# Altium PCB tablo tara.PcbDoc
Units mm, origin at the board's own origin, x right, y up, seen from the top; angles counter-clockwise.
Board outline 151 x 86.38 mm, 2 copper layers (Top Layer, Bottom Layer); 29 components, 10 nets, 72 pads, 0 vias.
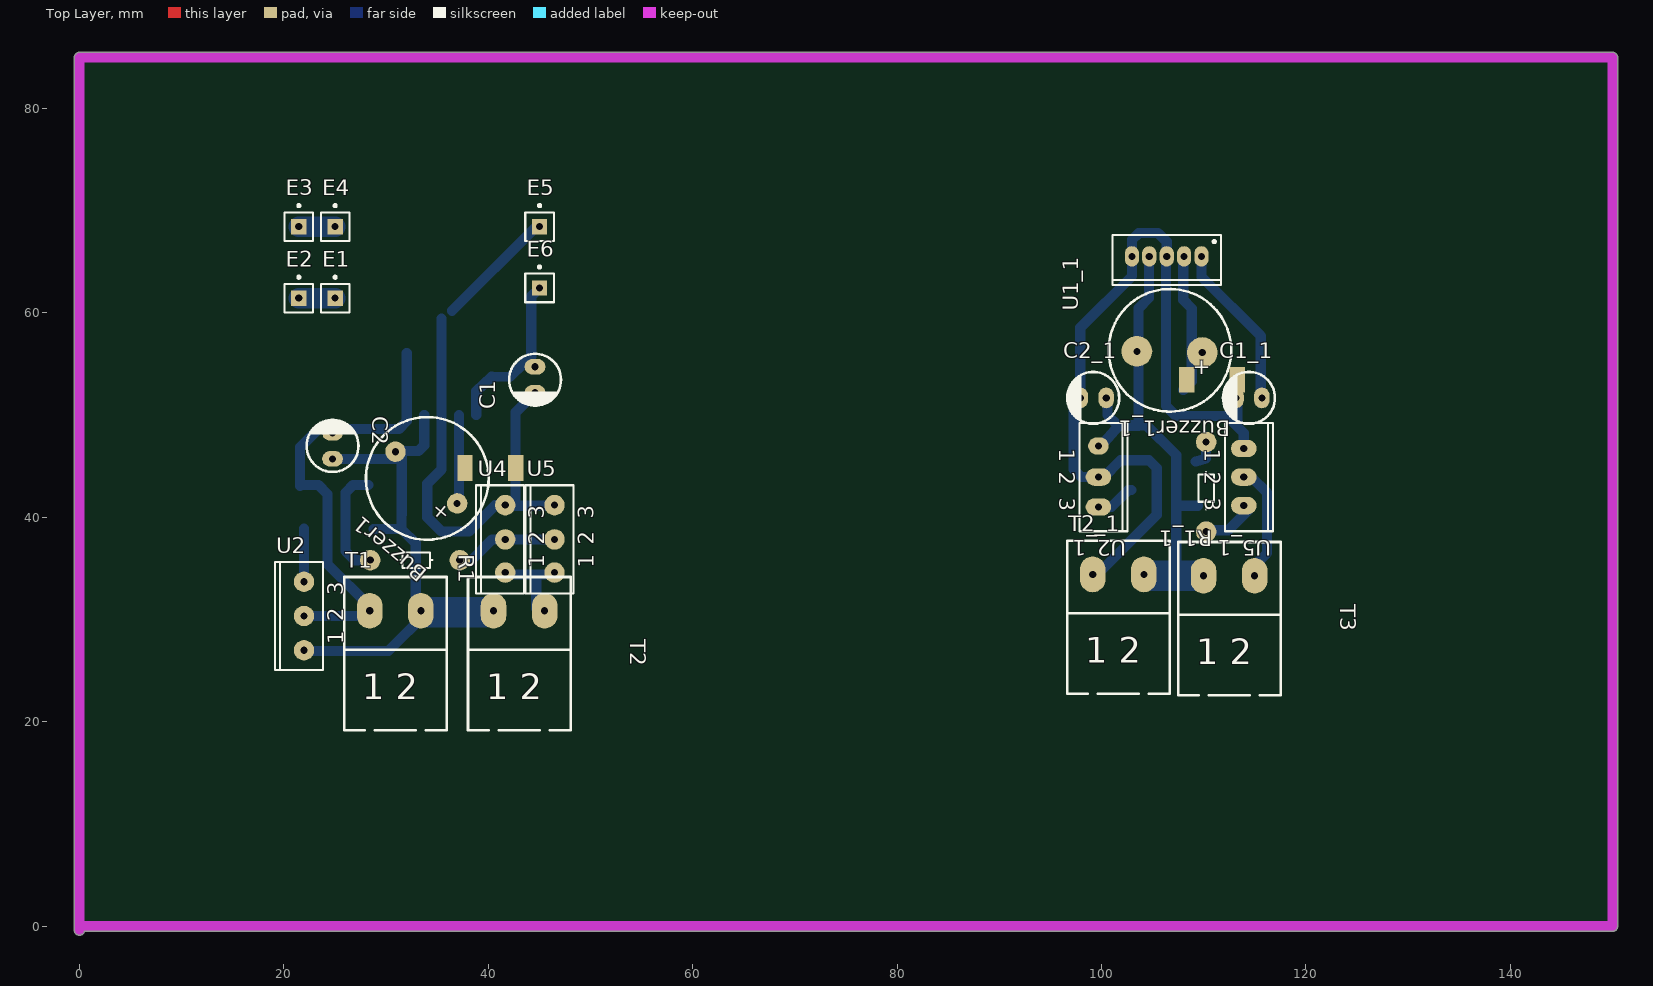
[diagram p0: Top Layer view]
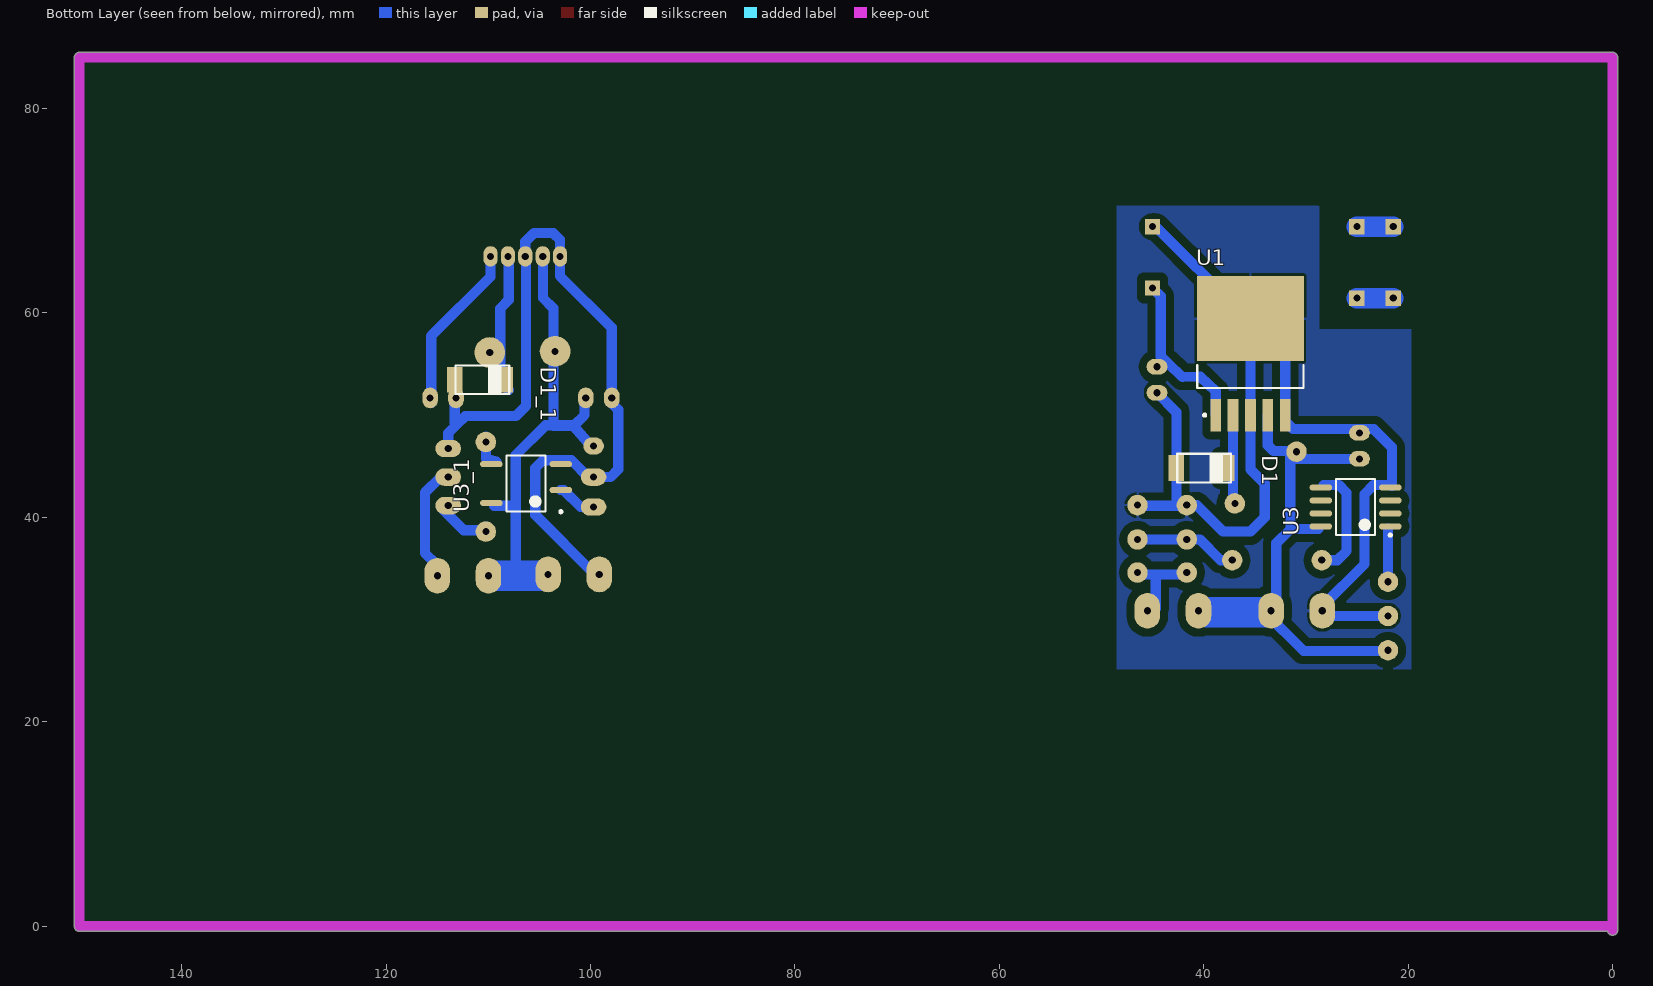
[diagram p1: Bottom Layer view, seen from below]

## Layer stack, top to bottom
Top Solder: solder mask 0.0102, Solder Resist, Dk 3.5
Top Layer: signal copper 0.0356
Dielectric 1: dielectric 0.32, FR-4, Dk 4.8
Bottom Layer: signal copper 0.0356
Bottom Solder: solder mask 0.0102, Solder Resist, Dk 3.5

## Board outline
-0.5,-0.381 -0.5,85 cw(c0,85) 0,85.5 150,85.5 cw(c150,85) 150.5,85 150.5,0 cw(c150,0) 150,-0.5 0.486,-0.5 cw(c0,-0.381)

## Design rules (kind name [scope] priority, off if disabled: settings)
Clearance Clearance_1 [InPolygon] p1: gap=0.8 ignorepadtopadclearanceinfootprint=FALSE
Clearance [All] p2: gap=0.254 ignorepadtopadclearanceinfootprint=FALSE except(0: Arc-Hole Track-Hole SMDPad-Hole THPad-Hole Via-Hole Fill-Hole Poly-Hole Region-Hole Text-Hole)
PolygonConnect [All] p1: connectstyle=Relief reliefconductorwidth=0.254 reliefentries=4 polygonreliefangle="90 Angle" airgapwidth=0.254
RoomDefinition "tablo tara" [InComponentClass('tablo tara')] p1: confinementstyle=ConfineIn formatcopy=TRUE lockcomponents=FALSE outline 144.907,-4.953 247.904,-4.953 247.904,23.114 144.907,23.114
RoutingLayers [All] p1: top layer_v5=FALSE bottom layer_v5=TRUE
RoutingVias [All] p1: holewidth=0.711 width=2.5 viastyle="Through Hole" minholewidth=0.711 minwidth=1.27 maxholewidth=0.711 maxwidth=2
SolderMaskExpansion [All] p1: expansion=0.102
Width [All] p1: maxlimit=3 minlimit=0.5 preferedwidth=1
29 further rules are at their usual default settings.

## Components (designator, comment, footprint, x,y, rotation, side; value= is the part's Value field where it differs from the comment)
Buzzer1 "Buzzer" BUZZER#1 34.036,43.815 r140 top
Buzzer1_1 "Buzzer" BUZZER#2 106.695,56.348 r180 top (schematic designator Buzzer1)
C1 "Value" ELEC-CAP-RAD10-20 44.577,53.467 r90 top
C1_1 "Value" ELEC-CAP-RAD10-20 114.427,51.689 r0 top (schematic designator C1)
C2 "Value" ELEC-CAP-RAD10-20 24.765,46.99 r270 top
C2_1 "Value" ELEC-CAP-RAD10-20 99.187,51.689 r0 top (schematic designator C2)
D1 "MODEL" DO-41 43.688,44.831 r180 bottom
D1_1 "MODEL" DO-41 114.3,53.467 r180 bottom (schematic designator D1)
E1 "Antenna" PIN1 25.019,61.448 r0 top
E2 "Antenna" PIN1 21.463,61.448 r0 top
E3 "Antenna" PIN1 21.463,68.448 r0 top
E4 "Antenna" PIN1 25.019,68.448 r0 top
E5 "Antenna" PIN1 45.018,68.448 r0 top
E6 "Antenna" PIN1 45.018,62.448 r0 top
R1 "Res2" Res50 34.163,35.814 r0 top
R1_1 "Res2" Res50 110.236,41.656 r270 top (schematic designator R1)
T1 "Phoenix terminal" "phoenix terminal 2" 25.908,19.177 r0 top
T2 "Phoenix terminal" "phoenix terminal 2" 38.02,19.177 r0 top
T2_1 "Phoenix terminal" "phoenix terminal 2" 96.647,22.733 r0 top (schematic designator T2)
T3 "Phoenix terminal" "phoenix terminal 2" 107.489,22.606 r0 top
U1 "LM2596S-3.3" TS5B_N 35.433,56.007 r90 bottom
U1_1 "LM2576T-3.3" T05A 106.377,65.532 r180 top (schematic designator U1)
U2 "L4931CV30" TO-220A#1 21.971,30.353 r90 top
U2_1 "L4931CV30" TO-220A#2 99.695,43.942 r270 top (schematic designator U2)
U3 "ATtiny15L-1SC" 8S2_N#1 25.146,41.021 r0 bottom
U3_1 "ATtiny15L-1SC" 8S2_N#2 106.299,43.307 r0 bottom (schematic designator U3)
U4 "L4931CV30" TO-220A#3 41.656,37.846 r90 top
U5 "L4931CV30" TO-220A#3 46.482,37.846 r90 top
U5_1 "L4931CV30" TO-220A#4 113.919,43.942 r270 top (schematic designator U5)

## Footprints (in the part's own frame and the unit in brackets; to place one, negate y for a bottom-side part, rotate by r counter-clockwise, add the part's x,y. Pads: shape width x height; smd on the part's side, far side on the other; paste and mask are expansions set on the pad)
8S2_N#1 [mm] "SOP, 8-Leads, Body 5.3x5.3mm, Pitch 1.27mm, IPC Medium Density"
  oval 2.2x0.6 smd: 1(-3.4,1.905) 2(-3.4,0.635) 3(-3.4,-0.635) 4(-3.4,-1.905) 5(3.4,-1.905) 6(3.4,-0.635) 7(3.4,0.635) 8(3.4,1.905)
  silkscreen extent -3.52,-2.75 1.9,2.88, body extent -2.73,-2.75 2.73,2.75, height 2.16
8S2_N#2 [mm] "SOP, 8-Leads, Body 5.3x5.3mm, Pitch 1.27mm, IPC Medium Density"
  oval 2.2x0.6 smd: 2(-3.4,0.635) 4(-3.4,-1.905) 5(3.4,-1.905) 8(3.4,1.905)
  silkscreen extent -3.52,-2.75 1.9,2.88, body extent -2.73,-2.75 2.73,2.75, height 2.16
BUZZER#1 [mm] "BUZZER"
  round 2 hole 0.7: 1(-3.81,0) 2(4.064,0)
  silkscreen extent -6,-6 6,6
BUZZER#2 [mm] "BUZZER"
  round 3 hole 0.7: 1(-3.16,0.214) 2(3.231,0.105)
  silkscreen extent -6,-6 6,6
DO-41 [mm]
  rect 1.5x2.5 all layers, no hole: 1(1.016,0) 2(5.969,0)
  silkscreen extent 1.1,-1.5 6.35,1.5, body extent -0.41,-1.33 8,1.33, height 3.33
ELEC-CAP-RAD10-20 [mil]
  oval 60x80 hole 27.56: 1(-50,0) 2(50,0)
  silkscreen extent -100,-100 100,100, body extent -124,-124 124,124, height 404
"phoenix terminal 2" [mm] "2 terminals"
  oval 2.5x3.5 hole 0.7: 1(2.493,11.684) 2(7.493,11.684)
  silkscreen extent 0,0 10.03,15
PIN1 [mm] "Generic Antenna; 1 Lead"
  rect 1.5x1.5 hole 0.7: 1(0,0)
  silkscreen extent -1.4,-1.4 1.4,2.17
Res50 [mm] "50mm Pin Spacing"
  round 2 hole 0.7: 1(-5.715,0) 2(3.048,0)
  silkscreen extent -2.77,-0.76 0.38,0.76
T05A [mm] "TO, Thru-Hole, Vertical, Heatsink Mounted; 5 In-Line Leads; Pitch 1.70 mm"
  oval 1.4x2 hole 0.7: 1(-3.4,0) 2(-1.7,0) 3(0,0) 4(1.7,0) 5(3.4,0)
  silkscreen extent -5.3,-2.1 5.3,2.8, body extent -5.35,-2.15 5.35,2.85, height 19.6
TO-220A#1 [mm] "TO, Thru-Hole, Vertical, Heatsink Mounted; 3 In-Line Leads; Pitch 2.54 mm"
  round 2 hole 0.7: 1(-3.353,0) 2(0,0) 3(3.347,0)
  silkscreen extent -5.3,-1.85 5.3,2.85
TO-220A#2 [mm] "TO, Thru-Hole, Vertical, Heatsink Mounted; 3 In-Line Leads; Pitch 2.54 mm"
  oval 1.7x2 hole 0.7: 1(-3.048,0)
  oval 1.7x2.5 hole 0.7: 2(0,0) 3(2.921,0)
  silkscreen extent -5.3,-1.85 5.3,2.85
TO-220A#3 [mm] "TO, Thru-Hole, Vertical, Heatsink Mounted; 3 In-Line Leads; Pitch 2.54 mm"
  round 2 hole 0.7: 1(-3.246,0) 2(0,0) 3(3.354,0)
  silkscreen extent -5.3,-1.85 5.3,2.85
TO-220A#4 [mm] "TO, Thru-Hole, Vertical, Heatsink Mounted; 3 In-Line Leads; Pitch 2.54 mm"
  oval 1.7x2.5 hole 0.7: 1(-2.794,0) 2(0,0) 3(2.794,0)
  silkscreen extent -5.3,-1.85 5.3,2.85
TS5B_N [mm] "D2-PAK, 6-Leads, Body 8.6x10.2mm, Pitch 1.7mm, Lead Span 14.1mm, IPC Medium Density"
  rect 3.2x1.05 smd: 1(-6,3.4) 2(-6,1.7) 3(-6,0) 4(-6,-1.7) 5(-6,-3.4)
  rect 8.3x10.45 smd: 6(3.45,0)
  silkscreen extent -6.12,-5.2 -1.1,5.2, body extent -3.35,-5.2 6.05,5.2, height 4.65

## Part data
C1 C1_1 C2 C2_1: library part "Capacitor Electrolytic", "Electrolytic Capacitor"
D1 D1_1: library part Diode, "Diode", MODEL=1N4148
E1 E2 E3 E4 E5 E6: "Generic Antenna", LatestRevisionDate=17-Jul-2002, LatestRevisionNote="Re-released for DXP Platform.", PackageReference=PIN1, Published=24-Mar-1999, Publisher="Altium Limited"
R1 R1_1: "Resistor", LatestRevisionDate=17-Jul-2002, LatestRevisionNote="Re-released for DXP Platform.", PackageDescription="Axial Device, Thru-Hole; 2 Leads; 0.4 in Pin Spacing", PackageReference=AXIAL-0.4, Published=8-Jun-2000, Publisher="Altium Limited"
T1 T2 T2_1 T3: library part "Phoenix terminal 2", "Terminal 2 Pin", ComponentLinkURL=www.picpars.com, Designer="Seyed Mohsen Ghasemain", E-mail=picpars@gmail.com
U1: "SIMPLE SWITCHER Power Converter 150 KHz 3A Step-Down Voltage Regulator", DigiKeyPartNumber=LM2596S-3.3-ND, Manufacturer="National Semiconductor", PackageTopMarking="NSUZXYTT*LM2596S*-3.3 P+", PowerWise=N, Code_JEDEC=MO-169-AB, ComponentLink1Description="LM2596 Datasheet", ComponentLink1URL=http://www.national.com/ds/LM/LM2596.pdf, ComponentLink2Description="LM2596 Web Page", ComponentLink2URL=http://www.national.com/pf/LM/LM2596.html, ComponentLink3Description="TS5B Package Page", ComponentLink3URL=http://www.national.com/packaging/folders/ts5b.html, CompType=Switcher, DatasheetVersion=May-2002, FirstPublished=4-Dec-2008, PackageDescription="TO-263, Molded, .400 x .390 x .180in, 5 Lead, .067in Pitch, Surface Mount", PackageReference=TS5B, PackageVersion="revD, Apr-2005", PartNumber=LM2596S-3.3, PinCount=5, Publisher="Altium Limited", RoHS=O
U1_1: "SIMPLE SWITCHER; 3A Step-Down Voltage Regulator", DigiKeyPartNumber=LM2576T-3.3NS-ND, Manufacturer="National Semiconductor", PackageTopMarking="NSUZXYTT*LM2576T*-3.3 P+", PowerWise=N, Code_JEDEC=TO-220-AB, ComponentLink1Description="LM2576 Datasheet", ComponentLink1URL=http://www.national.com/ds/LM/LM2576.pdf, ComponentLink2Description="LM2576 Web Page", ComponentLink2URL=http://www.national.com/pf/LM/LM2576.html, ComponentLink3Description="T05A Package Page", ComponentLink3URL=http://www.national.com/packaging/folders/t05a.html, CompType=Switcher, DatasheetVersion=Aug-2004, FirstPublished=4-Dec-2008, PackageDescription="TO-220, Molded, 5 Lead, Straight", PackageReference=T05A, PackageVersion="revJ, Jan-1992", PartNumber=LM2576T-3.3, PinCount=5, Publisher="Altium Limited", RoHS=Y
U2 U2_1 U4 U5 U5_1: "250mA, Very Low Drop ( 0.4V) Voltage Regulator", ComponentLink1Description="Manufacturer Link", ComponentLink1URL=http://www.st.com/, ComponentLink2Description=Datasheet, ComponentLink2URL=http://www.st.com/stonline/products/literature/ds/4340/l4931abxx15.pdf, DatasheetVersion=Apr-1999, LatestRevisionDate=06-Jun-2005, LatestRevisionNote="PCB Pin sequence re-ordered.", PackageDescription="TO, Thru-Hole, Vertical, Heatsink Mounted; 3 In-Line Leads; Pitch 2.54 mm", PackageReference=TO-220A, PackageVersion=Jul-2004, Published=24-Aug-2001, Publisher="Altium Limited"
U3 U3_1: "8-Bit AVR Microcontroller with 1K Byte of Flash Memory", Supplier Part Number 1=ATTINY15L-1SC-ND, ComponentLink1Description=Datasheet, ComponentLink1URL=http://www.atmel.com/dyn/resources/prod_documents/doc1187.pdf, ComponentLink2Description="Atmel.com Home", ComponentLink2URL=http://www.atmel.com, DatasheetVersion=1187E-AVR-06/02, LatestRevisionDate=16-Oct-2006, LatestRevisionNote="IPC-7351 Footprint Added.", PackageDescription="8-Lead, 0.208\" Body, Plastic Small Outline Package (EIAJ)", PackageReference=8S2, PackageVersion="revF, Apr-2008", Published=17-Sep-2003, Publisher="Altium Limited", Supplier 1=Digi-Key, Supplier 2=Mouser, Supplier Part Number 2=556-ATTINY15L1SC
Buzzer1 Buzzer1_1: ComponentLinkURL=www.picpars.com, Designer="Seyed Mohsen Ghasemain"

## Nets (pads, with @x,y where several pads share a name; then routed paths per layer and width w, separated by ;. In a path a pad name is that pad's centre, name@x,y a point inside that pad or via, vN(x,y) a via of type N, cw(c..) or ccw(c..) an arc to the next point about the centre after c; other vN are vias at no path point)
bat: Buzzer1.2 C2.2 T1.2 T2.1 U1.4 U2.1 U3.8 | length 50.7
  Bottom Layer w1: U2.1@21.971,27.432 U2.1 21.971,26.924 30.226,26.924 T1.2@34.036,30.734 ; C2.2 Buzzer1.2@30.861,45.72 ; U3.8@28.8,38.862 31.496,38.862 ; T1.2@32.893,30.353 32.893,37.465 31.496,38.862 ; U1.4 33.733,47.068 33.147,46.482 31.496,46.482 31.543,46.435 31.543,40.306 31.496,40.259 31.496,38.862
  Bottom Layer w3: T1.2@34.036,30.734 T2.1@39.624,30.734
GND: C1.1 C2.1 D1.1 E5.1 T1.1 U1.3 U1.5 U1.6 U2.2 U3.4 U4.3 U5.3 | length 100.7
  Bottom Layer w1: U3.4@21.59,43.082 21.59,46.863 23.368,48.641 31.242,48.641 32.033,49.432 U1.5 U1.6@32.033,56.057 ; U2.2 28.147,30.353 28.401,30.099 T1.1 28.401,31.289 24.257,35.433 24.257,42.291 23.368,43.18 U3.4@22,43.18 ; U1.6 U1.3 35.433,44.704 34.036,43.307 34.036,40.005 35.433,38.608 38.1,38.608 40.692,41.2 U4.3@40.842,41.2 ; U1.6@36.449,60.219 44.678,68.448 E5.1 ; C1.1 42.672,50.292 D1.1 42.672,41.402 42.418,41.148 U5.3@45.72,41.148
ir: U2.3 U3.1 | length 5.2
  Bottom Layer w1: U2.3 U3.1@21.971,38.891
NetBuzzer1_1: Buzzer1.1 D1.2 U1.2 | length 8.7
  Bottom Layer w1: Buzzer1.1 37.133,41.544 U1.2
NetC1_2: C1.2 E6.1 U1.1 | length 16.4
  Bottom Layer w1: U1.1 38.833,52.344 40.334,53.775 42.075,53.732 43.501,55.091 43.888,55.46 44.196,55.753 44.196,61.626 E6.1 E6.1@45.212,62.254
NetE1_1: E1.1 E2.1 | length 3.6
  Bottom Layer w2: E2.1 E1.1
NetE3_1: E3.1 E4.1 | length 3.6
  Bottom Layer w2: E3.1 E4.1
NetR1_2: R1.2 U4.2 U5.2 | length 10.1
  Bottom Layer w1: R1.2 38.354,35.814 40.386,37.846 U4.2 U5.2
NetT2_2: T2.2 U4.1 U5.1 | length 7.8
  Bottom Layer w1: U4.1@42.545,34.417 44.704,34.417 ; U5.1@45.593,34.417 44.704,34.417 ; T2.2@45.72,30.099 44.704,31.115 44.704,34.417
out: R1.1 U3.5 | length 11.1
  Bottom Layer w1: U3.5@28.292,43.18 26.797,43.18 26.035,42.418 26.035,36.703 26.924,35.814 R1.1
pads on no net: Buzzer1_1.1 Buzzer1_1.2 C1_1.1 C1_1.2 C2_1.1 C2_1.2 D1_1.1 D1_1.2 R1_1.1 R1_1.2 T2_1.1 T2_1.2 T3.1 T3.2 U1_1.1 U1_1.2 U1_1.3 U1_1.4 U1_1.5 U2_1.1 U2_1.2 U2_1.3 U3.2 U3.3 U3.6 U3.7 U3_1.2 U3_1.4 U3_1.5 U3_1.8 U5_1.1 U5_1.2 U5_1.3
copper on no net: | length 192.3
  Bottom Layer w1: 99.14,34.417 99.568,34.417 105.41,40.259 105.41,44.831 104.648,45.593 101.854,45.593 100.203,43.942 99.695,43.942 98.044,43.942 97.282,44.704 97.282,50.546 97.917,51.181 97.917,51.689 97.917,58.547 102.977,63.607 102.977,65.532 102.977,67.163 103.632,67.818 105.537,67.818 106.377,66.978 106.377,65.532 ; 99.187,41.021 99.695,41.021 100.965,41.021 102.616,42.672 102.899,42.672 ; 99.187,46.99 99.695,46.99 99.949,46.99 101.649,48.944 ; 100.584,51.181 100.584,50.009 101.571,49.022 ; 103.632,33.909 104.14,34.417 107.696,34.417 ; 104.648,65.532 104.648,61.468 103.632,60.452 103.632,49.022 ; 106.299,65.532 106.299,50.927 107.315,49.911 112.268,49.911 113.093,49.085 ; 106.934,35.179 107.315,35.56 107.315,41.148 109.445,41.148 ; 107.315,41.402 107.315,46.101 104.394,49.022 103.632,49.022 ; 107.999,52.451 108.839,53.291 108.839,60.437 107.999,61.277 107.999,65.532 ; 109.22,45.466 109.599,45.572 110.236,45.749 110.236,47.371 110.236,47.879 ; 109.777,65.532 109.777,63.549 115.57,57.756 115.57,51.181 ; 110.236,39.116 110.617,38.735 112.395,38.735 114.364,40.703 ; 113.284,53.467 113.284,49.276 113.093,49.085 ; 113.919,46.736 113.919,48.26 113.093,49.085 ; 114.554,43.942 114.681,43.942 116.205,42.418 116.205,36.52 115.09,35.405 ; 115.062,35.433 115.09,35.405 ; 115.443,35.179 115.443,35.052 ; 101.571,49.022 101.649,48.944 ; 101.571,49.022 103.632,49.022 ; 101.649,48.944 103.632,48.944 103.632,49.022 ; 115.09,35.405 115.443,35.052 ; 115.443,35.052 114.681,34.29 114.982,34.29 115.443,34.29 115.443,35.052
  Bottom Layer w3: 104.775,34.29 109.347,34.29

## Polygon pours and split planes (outlines as drawn)
GND on Bottom Layer "Bottom Layer-No Net" (solid, pour order 4): 19.685,25.146 48.514,25.146 48.514,70.485 28.829,70.485 28.702,70.612 28.702,58.42 19.685,58.42

## Keep-outs
Keep-Out Layer:
  lines w1: 0,-0.381 0,85 150,85 150,0 0,0

## Text inside footprints (layer, text, board x,y; h text height)
Buzzer1: Top Overlay "+" at 36.457,40.478 h1.52 r140
Buzzer1_1: Top Overlay "+" at 110.695,55.348 h1.52 r180
T1: Top Overlay "1 2" at 27.686,22.225 h2.5
T2: Top Overlay "1 2" at 39.798,22.225 h2.5
T2_1: Top Overlay "1 2" at 98.425,25.781 h2.5
T3: Top Overlay "1 2" at 109.267,25.654 h2.5
U2: Top Overlay "3" at 25.796,32.393 h1.5 r90; Top Overlay "2" at 25.796,29.853 h1.5 r90; Top Overlay "1" at 25.796,27.563 h1.5 r90
U2_1: Top Overlay "3" at 95.87,41.902 h1.5 r270; Top Overlay "2" at 95.87,44.442 h1.5 r270; Top Overlay "1" at 95.87,46.732 h1.5 r270
U4: Top Overlay "3" at 45.481,39.886 h1.5 r90; Top Overlay "2" at 45.481,37.346 h1.5 r90; Top Overlay "1" at 45.481,35.056 h1.5 r90
U5: Top Overlay "3" at 50.307,39.886 h1.5 r90; Top Overlay "2" at 50.307,37.346 h1.5 r90; Top Overlay "1" at 50.307,35.056 h1.5 r90
U5_1: Top Overlay "3" at 110.094,41.902 h1.5 r270; Top Overlay "2" at 110.094,44.442 h1.5 r270; Top Overlay "1" at 110.094,46.732 h1.5 r270